# Altium PCB PMP30825_RevA.PcbDoc (part 3 of 3)
Units mil, origin at the board's own origin, x right, y up, seen from the top; angles counter-clockwise.
Board outline 3750 x 1750 mil, 2 copper layers (Top Layer, Bottom Layer), stack 62 mil thick; 85 components, 40 nets, 187 pads, 24 vias.
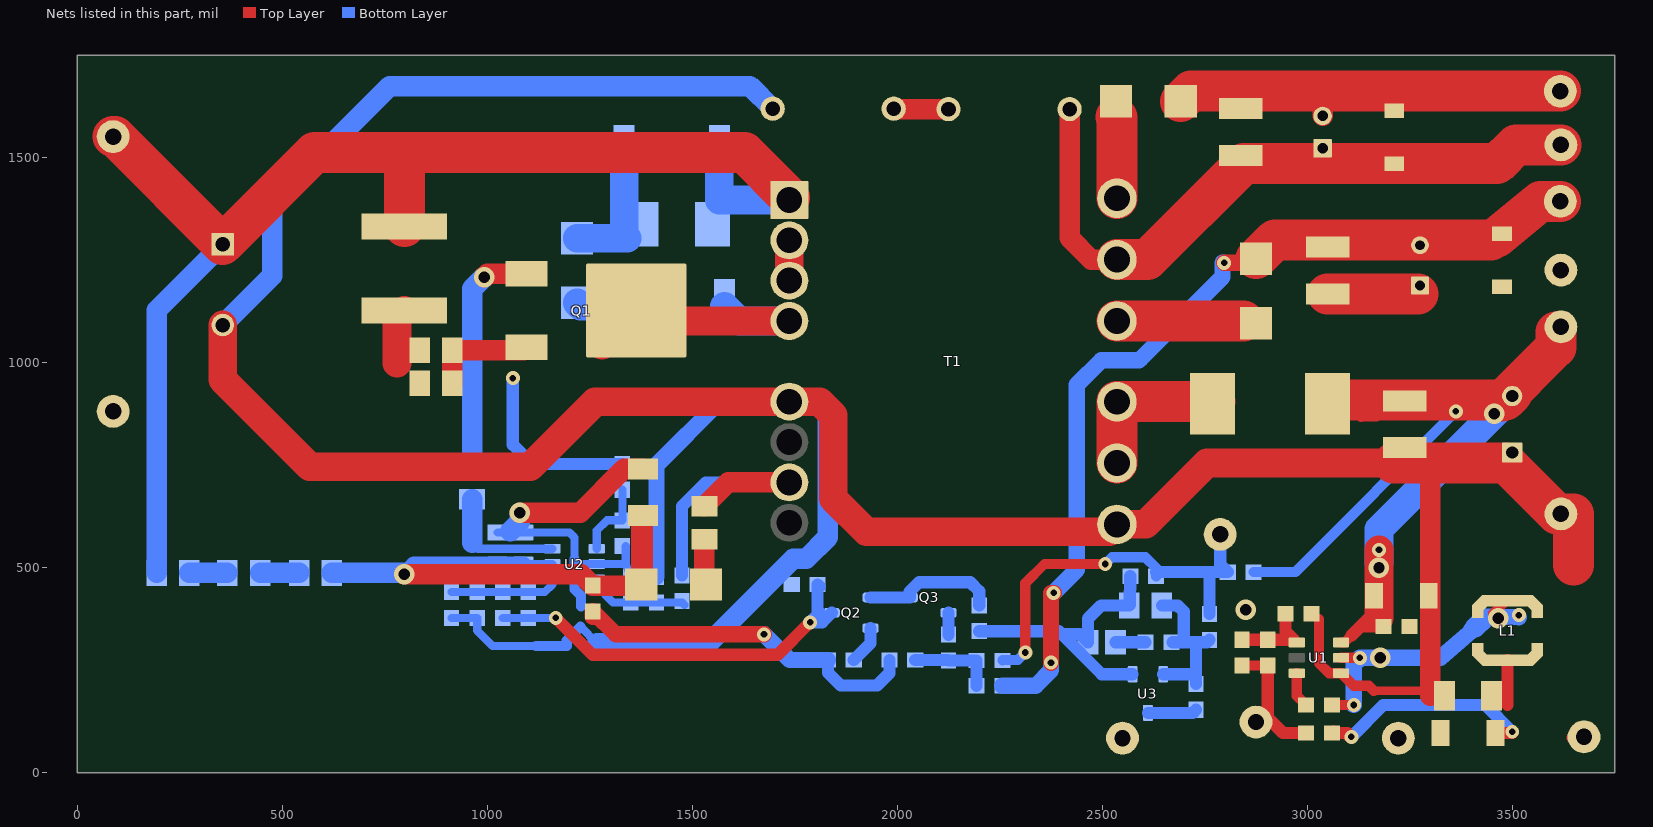
[diagram p2: the nets of this part, all layers, seen from the top]

## Part data (continued)
U2: library part CMP-0078369-2, "High-Efficiency Low-Cost Flyback Controller with Secondary-Side Regulation, DBV0006A (SOT-23-6)", Alternate Manufacturer="Texas Instruments", AEC Category=Q200, AEC Qualified=N, ComponentLink1Description="Datasheet Link", ComponentLink1URL=https://sps16.itg.ti.com/sites/KMS/crossdivteams/altium/docs/ComponentDatasheets/UCC28742_ds(preliminary)_20171023.pdf, ComponentLink2Description="Product Folder", ComponentLink2URL=TBD, ComponentLink3Description="Online Datasheet", ComponentLink3URL=http://www.ti.com/product/GPN/datasheet, CompType=IC, Manufacturer="Texas Instruments", MountType=SMT, PackageDescription=SOT-23-6, PackageReference=DBV0006A, PartNumber=UCC28742DBVR, SizeArea_mm2=8.12, SizeAreaWB_mm2=14.82, SizeX_mm=2.8, SizeY_mm=2.9, SizeZ_mm=1.45
U3: library part CMP-0084731-1, "High Bandwidth Low-Iq Programmable Shunt Regulator, DBZ0003A (SOT-23-3)", Alternate Manufacturer="Texas Instruments", AEC Category=Q200, AEC Qualified=N, ComponentLink1Description="Datasheet Link", ComponentLink1URL=http://www.ti.com/lit/ds/symlink/atl431li.pdf, ComponentLink2Description="Product Folder", ComponentLink2URL=http://www.ti.com/product/atl431li, ComponentLink3Description="Online Datasheet", ComponentLink3URL=http://www.ti.com/product/atl431li/datasheet, CompType=IC, Manufacturer="Texas Instruments", MountType=SMT, PackageDescription=SOT-23-3, PackageReference=DBZ0003A, PartNumber=ATL431LIBQDBZR, SizeArea_mm2=7.5, SizeAreaWB_mm2=14, SizeX_mm=2.5, SizeY_mm=3, SizeZ_mm=1.12

## Via types
v1: diameter 34, hole 16, Top Layer to Bottom Layer, 16 vias
v2: diameter 50, hole 28, Top Layer to Bottom Layer, 8 vias

## Nets (pads, with @x,y where several pads share a name; then routed paths per layer and width w, separated by ;. In a path a pad name is that pad's centre, name@x,y a point inside that pad or via, vN(x,y) a via of type N, cw(c..) or ccw(c..) an arc to the next point about the centre after c; other vN are vias at no path point)
12Vout: C7.1 C8.2 C13.1 C14.1 D7.1 R9.2 TP7.1 U1.3 | length 2301.4
  Top Layer w25: U1.3@3082.68,317.69 3090.94,317.69 3108.36,335.1 ; D7.1@3091.14,908.6 3131.25,868.49 3131.52,868.77 3168.75,868.77
  Top Layer w30: 3108.36,335.1 3129.92,356.67 ; C13.1@3162.7,431.9 3162.7,389.44 3129.92,356.67 ; C14.1@3186.02,356.67 3129.92,356.67
  Top Layer w50: C7.1@3219.1,919.13 C7.1@3229.63,908.6
  Top Layer w70: 3175,377.64 v2(3175,500) v1(3175,543.75)
  Top Layer w100: D7.1@3091.14,908.6 3229.63,908.6 3483.6,908.6 C8.2@3500,925 ; 3475,906.25 3593.75,1025 ; 3606.25,1037.68 TP7.1@3606.25,1075
  Bottom Layer w25: R9.2@2869,489.43 2970.68,489.43 v1(3362.5,881.25)
  Bottom Layer w70: v2@3175,512.5 v1(3175,543.75) 3175,593.9 v2(3456.25,875.15) C8.2@3500,918.9
15Vout: C5.2 C6.1 D4.1 D6.1 R7.2 TP4.1 | length 2224
  Top Layer w40: v1(2375,268.75) 2375,438.5 v1(2381.25,438.5) ; v1(2797.34,1243.75) 2865.01,1243.75 D4.1@2875,1253.74
  Top Layer w100: D4.1@2875,1253.74 2921.26,1300 3448.7,1300 ; D6.1@3462.35,1306.25 3568.75,1393.75 TP4.1@3617.46,1393.75
  Bottom Layer w25: 2589.73,1005.66 2593.75,1009.69
  Bottom Layer w40: R7.2@2256.5,212.5 2337.5,212.5 2375,250 v1(2375,268.75) ; v1(2381.25,438.5) 2437.5,494.75 2437.5,945.88 2497.28,1005.66 2589.73,1005.66 ; 2593.75,1009.69 2793.33,1209.27 2793.33,1243.75 v1(2797.34,1243.75)
GND: C3.2 C4.2 C5.1 C6.2 C7.2 C8.1 C9.2 C11.2 C13.2 C14.2 C16.2 C17.2 C18.2 C19.2 C20.2 C23.2 C25.2 D6.2 R20.1 R21.1 R25.1 R26.1 R28.1 R29.2 R30.1 T1.5 T1.9 TP5.1 TP6.1 TP8.1 TP12.1 TP13.1 U1.1 U2.5 U3.3 | length 10444
  Top Layer w20: 3162.5,200 3281.25,200
  Top Layer w25: R20.1@3028.54,374.28 3028.54,267.63 3053.29,242.88 U1.1@3082.68,242.88 3113.06,212.5 3150,212.5 3162.5,200
  Top Layer w50: v2(1079.63,634.13) 1226.54,634.13 1333.62,741.22 C11.2@1379.63,741.22 ; C9.2@1696.11,1619.59 C9.2@1696.11,1622.64 ; 3300,187.92 3300,755.39
  Top Layer w70: C4.2@354.82,1092.01 354.82,958.94 567.13,746.63 1104.63,746.63 1262.99,905 T1.5@1736.71,905 1810.67,905 1843.75,871.92 1843.75,668.75 1925,587.5 2517.64,587.5 T1.9@2535.93,605.79 2605.79,605.79 2755.39,755.39 3210.41,755.39 ; 779.63,999.13 779.63,1109.33 C3.2@797.74,1127.44
  Top Layer w100: C6.2@3050,1167.91 C5.1@3269.59,1167.91 ; 3210.41,755.39 3300,755.39 3485,755.39 3609.14,631.25 TP8.1@3618.75,631.25 3650,631.25 3650,506.25
  Bottom Layer w20: C25.2@912.89,377.64 R30.1@975.39,377.64 975.39,346.63 1012.89,309.13 1118.75,309.13 ; C17.2@1025.39,586 C18.2@1087.89,586 1200.39,586 1212.89,573.5 1212.89,521.63 1225.39,509.13 U2.5@1267.03,509.13 1337.89,509.13 ; 1227.49,356.25 1267.99,315.75 ; C23.2@1337.89,552.64 1337.89,509.13 ; C20.2@1412.89,478.13 R21.1@1350.39,478.13 1337.89,509.13
  Bottom Layer w25: 1118.75,309.13 1193.75,309.13 1193.75,322.51 1227.49,356.25 ; 1212.89,521.63 1212.89,447.71 1228.72,431.89 1228.72,406.25
  Bottom Layer w30: U3.3@2611.42,145.91 2721.02,145.91 R28.1@2728.64,153.53
  Bottom Layer w40: C20.2@1412.89,478.13 1412.89,750.77 1567.13,905 T1.5@1736.71,905
  Bottom Layer w50: C4.2@354.82,1092.01 475,1212.18 475,1387.5 762.5,1675 1640.7,1675 C9.2@1696.11,1619.59 ; 1056.64,589.41 1079.63,612.39 v2(1079.63,634.13) ; 1267.99,315.75 1540,315.75 1746.27,522.03 1778.19,522.03 1831,574.84 1831,884.66 1810.67,905 T1.5@1736.71,905
  other v2: 2850,397.29
IGND: C1.1 C2.2 C10.1 D2.2 T1.13 TP3.1 | length 1650.5
  Top Layer w50: C10.1@2420.28,1618.75 2420.28,1304.72 2473.54,1251.46 T1.13@2535.93,1251.46
  Top Layer w100: T1.13@2535.93,1251.46 2610.22,1251.46 2844.29,1485.53 D2.2@3212.5,1485.53 3463.4,1485.53 3509.12,1531.25 TP3.1@3618.75,1531.25
NetC1_2: C1.2 C2.1 D1.1 D2.1 TP1.1 | length 1002.4
  Top Layer w50: 3025,1662.5 3037.5,1650 C1.2@3037.5,1601.87
  Top Layer w100: D1.1@2691.24,1637.5 2716.24,1662.5 3025,1662.5 TP1.1@3617.46,1662.5
NetC3_1: C3.1 C4.1 D3.2 R1.2 R2.2 T1.1 TP2.1 | length 3231.4
  Top Layer w100: TP2.1@87.5,1551.66 92.02,1551.66 C4.1@354.82,1288.86 578.47,1512.5 800,1512.5 ; C3.1@797.74,1332.16 797.74,1510.24 800,1512.5 ; T1.1@1736.71,1402.83 1627.05,1512.5 800,1512.5
  Bottom Layer w50: R2.2@193.75,487.5 193.75,1127.78 C4.1@354.82,1288.86
  Bottom Layer w70: R1.2@1566.14,1512.5 1566.14,1397.12 T1.1@1736.71,1397.12
NetC9_1: C9.1 C10.2 | length 134
  Top Layer w50: C9.1@1991.39,1619.59 1992.22,1618.75 C10.2@2125,1618.75
NetC11_1: C11.1 C17.1 C18.1 D8.1 R4.1 R10.2 U2.2 | length 1440.6
  Top Layer w50: v2(797.74,484.13) 1229.63,484.13 R10.2@1257.26,456.5 1348.25,456.5 D8.1@1375.89,484.13 ; D8.1@1375.89,484.13 1379.63,484.13 C11.1@1379.63,627.05 1375.89,623.31 D8.1@1375.89,484.13
  Bottom Layer w20: C18.1@1087.89,509.13 U2.2@1158.76,509.13
  Bottom Layer w40: v2(797.74,484.13) 820.87,507.26 C17.1@1025.39,507.26 C18.1@1087.89,507.26
  Bottom Layer w50: R4.1@621.25,487.5 794.37,487.5 v2(797.74,484.13)
NetC12_1: C12.1 L1.1 U1.2 | length 688.2
  Top Layer w25: C12.1@3060.04,165.29 v1(3113.54,165.29) ; U1.2@3082.68,280.29 v1(3128.54,280.29) ; v2@3453.54,388.1 3484.73,419.29 L1.1@3488.54,419.29
  Bottom Layer w40: v1(3113.54,165.29) 3113.54,263.54 3128.54,278.54 v1(3128.54,280.29) v2(3178.54,280.29) 3313.05,280.29 ; 3325,280.29 3400,345.31 cw(c3409.69,345.31) 3409.69,355 ; 3429.73,375.04 3429.73,381.25 3429.91,381.25 3466.14,380.23 v1@3515.89,378.83
  Bottom Layer w50: 3409.69,355 3429.73,375.04
  other v1: 3516.04,384.42
  other v2: 3466.04,376.92
NetC12_2: C12.2 U1.6 | length 87
  Top Layer w25: U1.6@2974.41,242.88 2974.41,187.92 C12.2@2997.05,165.29
NetC15_1: C15.1 R8.1 R14.2 TP10.1 | length 335.9
  Top Layer w25: C15.1@2841.04,261.29 R14.2@2903.54,261.29
  Top Layer w30: TP10.1@2866.04,134.42 TP10.1@2903.54,134.42 ; R14.2@2903.54,261.29 TP10.1@2903.54,134.42 ; R8.1@2997.05,96.92 2941.04,96.92 TP10.1@2903.54,134.42
NetC15_2: C15.2 R14.1 R20.2 U1.4 | length 198.7
  Top Layer w30: C15.2@2841.04,324.28 2967.44,324.28 2947.05,344.67 R20.2@2947.05,388.1
NetC16_1: C16.1 C19.1 L1.2 R8.2 TP9.1 | length 668.2
  Top Layer w30: R8.2@3063.98,100.86 R8.2@3060.04,96.92 3098.36,96.92 ccw(c3107.78,96.92) v1@3101.39,90 ; C19.1@3459.16,96.92 3500,96.92 v1(3500,100) ; 3488.54,165.29 L1.2@3488.54,274.29 ; TP9.1@3647.69,85.19 TP9.1@3656.25,93.75
  Bottom Layer w30: v1(3107.78,87.5) 3185.56,165.29 3434.71,165.29 v1(3500,100)
NetC20_1: C20.1 R13.1 R21.2 U2.6 | length 250.1
  Bottom Layer w20: U2.6@1267.03,471.73 1267.03,455 1306.89,415.14 R21.2@1350.39,415.14 C20.1@1412.89,415.14 1475.39,415.14 R13.1@1481.4,409.13
NetC21_1: C21.1 R18.1 R23.2 R28.2 U3.2 | length 411.3
  Bottom Layer w30: C21.1@2645.71,408.13 2683.94,408.13 2698.92,393.15 2698.92,318.15 ; U3.2@2648.82,240.39 2725.75,240.39 2728.64,237.5 ; R23.2@2671.65,318.15 2698.92,318.15 ; R28.2@2728.64,216.52 2728.64,237.5 ; R18.1@2761.42,324.15 2755.41,318.15 2723.92,318.15 ; 2698.92,318.15 2723.92,318.15 ; 2723.92,318.15 2728.64,313.42 2728.64,237.5
NetC21_2: C21.2 C22.1 R17.2 R24.1 U3.1 | length 733.3
  Bottom Layer w30: R24.1@2200,345.31 2394,345.31 2401.09,338.22 ; R17.2@2568.5,479 2567.42,409.84 C21.2@2565.71,408.13 2497.28,408.13 2465.45,376.3 C22.1@2465.45,318.15 2445.39,338.22 2401.09,338.22 ; U3.1@2574.02,240.39 2498.92,240.39 2401.09,338.22
NetC22_2: C22.2 R23.1 | length 73.3
  Bottom Layer w30: C22.2@2532.38,318.15 R23.1@2605.71,318.15
NetC23_1: C23.1 R22.2 U2.4 | length 191.5
  Bottom Layer w20: U2.4@1267.03,546.53 1267.03,590.53 1292.13,615.63 C23.1@1329.63,615.63 R22.2@1329.63,690.14
NetC24_1: C24.1 C25.1 R27.2 R30.2 U2.1 | length 266.1
  Bottom Layer w20: C25.1@912.89,440.63 C24.1@1037.89,440.63 1140.26,440.63 1158.76,459.13 U2.1@1158.76,471.73
NetC24_2: C24.2 Q2.3 R27.1 R29.1 | length 993.1
  Top Layer w30: v1(1167.13,377.64) 1257.26,287.5 1707.99,287.5 v1(1787.5,367.01)
  Bottom Layer w20: C24.2@1037.89,377.64 R27.1@1100.39,377.64 v1(1167.13,377.64)
  Bottom Layer w30: R29.1@1810.67,454.11 R29.1@1805.65,459.13 1805.65,395.19 1810.67,390.17 v1(1787.5,367.01) 1817.09,367.01 Q2.3@1840.26,390.17
NetD1_2: D1.2 T1.14 | length 199.8
  Top Layer w100: D1.2@2533.76,1600 2535.93,1597.83 T1.14@2535.93,1401.06
NetD3_1: D3.1 D5.1 R1.1 | length 334.6
  Bottom Layer w70: D5.1@1219.14,1303.74 1341.73,1303.74 1333.86,1311.61 R1.1@1333.86,1512.5
NetD4_2: D4.2 T1.12 | length 308.4
  Top Layer w100: T1.12@2535.93,1101.85 D4.2@2844.29,1101.85
NetD5_2: D5.2 R5.2 | length 130.8
  Bottom Layer w70: D5.2@1219.14,1146.26 1227.9,1137.5 R5.2@1346.36,1137.5
NetD7_2: D7.2 T1.10 T1.11 | length 408.7
  Top Layer w50: D7.2@2775,905 D7.2@2789.13,919.13
  Top Layer w100: T1.10@2535.93,755.39 T1.11@2535.93,905 D7.2@2775,905
NetD8_2: D8.2 R6.1 | length 112.1
  Top Layer w50: R6.1@1529.63,569.72 1529.63,462.87 D8.2@1533.37,459.13
NetQ1_1: Q1.1 R19.2 | length 581.6
  Top Layer w50: v2(992.13,1209.13) 1000.2,1217.2 Q1.1@1095.77,1217.2
  Bottom Layer w50: R19.2@962.89,746.63 962.89,1179.9 v2(992.13,1209.13)
NetQ1_2: Q1.2 R5.1 T1.4 | length 654.3
  Top Layer w70: Q1.2@1279.63,1042.99 1338.48,1101.85 T1.4@1736.71,1101.85
  Bottom Layer w70: R5.1@1578.64,1137.5 1614.29,1101.85 T1.4@1736.71,1101.85
NetQ1_3: Q1.3 R22.1 R25.2 R26.2 | length 713.3
  Top Layer w50: R25.2@915,950 R26.2@915,1030.45 1088.54,1030.45 Q1.3@1095.77,1037.68
  Bottom Layer w30: v1(1062.5,962.5) 1062.5,800 1109.37,753.13 R22.1@1329.63,753.13
NetQ2_1: Q2.1 Q3.1 Q3.3 R24.2 | length 332.7
  Bottom Layer w30: Q2.1@1934.74,427.58 Q3.3@2030.51,427.58 2030.51,441.83 2053.66,464.98 Q3.1@2125,464.98 2177.69,464.98 2200,442.67 R24.2@2200,408.3
NetQ2_2: Q2.2 R15.1 | length 94.7
  Bottom Layer w30: R15.1@1894,275 1934.74,315.75 Q2.2@1934.74,352.77
NetQ3_2: Q3.2 R16.1 | length 53.3
  Bottom Layer w30: R16.1@2125,336.9 Q3.2@2125,390.17
NetR2_1: R2.1 R3.2 | length 92.5
  Bottom Layer w50: R2.1@273.75,487.5 R3.2@366.25,487.5
NetR3_1: R3.1 R4.2 | length 95
  Bottom Layer w50: R3.1@446.25,487.5 R4.2@541.25,487.5
NetR6_2: R6.2 R13.2 T1.7 | length 685.6
  Top Layer w50: R6.2@1529.63,649.72 1588.05,708.15 T1.7@1736.71,708.15
  Bottom Layer w30: R13.2@1475,481.5 1475,650 1533.15,708.15 T1.7@1736.71,708.15
NetR7_1: R7.1 R11.1 R12.2 R16.2 | length 211.4
  Bottom Layer w30: R11.1@2044,275 2123.91,275 R16.2@2125,273.91 R12.2@2193.5,273.91 R7.1@2193.5,212.5
NetR9_1: R9.1 R12.1 R17.1 R18.2 TP11.1 | length 986.1
  Top Layer w25: v1(2312.5,293.34) 2312.5,462.5 2359.13,509.13 v1(2507.28,509.13)
  Bottom Layer w25: R12.1@2256.5,273.91 2257.59,275 2294.16,275 v1(2312.5,293.34) ; v1(2507.28,509.13) 2523.69,525.54 2605.23,525.54 2631.5,499.28 2631.5,489.43 R17.1@2631.5,479
  Bottom Layer w30: R17.1@2631.5,489.43 2760.57,489.43 ; R18.2@2761.42,387.15 2761.42,488.58 2760.57,489.43 ; TP11.1@2787.5,581.25 2787.5,507.94 R9.1@2806,489.43 2760.57,489.43
NetR10_1: R10.1 R11.2 R15.2 | length 874.4
  Top Layer w40: R10.1@1257.26,380.24 R10.1@1257.26,393.5 1313.27,337.5 v1(1675,337.5)
  Bottom Layer w30: R15.2@1831,275 1831,244 1862.01,212.99 1950.98,212.99 1981,243.01 R11.2@1981,275
  Bottom Layer w40: v1(1675,337.5) 1737.5,275 R15.2@1831,275
NetR19_1: R19.1 U2.3 | length 307.4
  Bottom Layer w20: 963.03,560.94 977.44,546.53 U2.3@1158.76,546.53
  Bottom Layer w50: R19.1@962.89,666.63 962.89,561.08 963.03,560.94
NetT1_2: T1.2 T1.3 | length 98.4
  Top Layer w70: T1.3@1736.71,1200.27 T1.2@1736.71,1298.7
pads on no net: T1.6 T1.8 U1.5

## Polygon pours and split planes (outlines as drawn)
NetC3_1 on Top Layer "TOP_LAYER_NETC3_1_P036" (solid, remove dead copper, pour order 36): 418.75,1239.21 104.54,1239.21 cw(c104.54,1306.25) 37.5,1306.25 37.5,1575 cw(c81.25,1575) 81.25,1618.75 343.75,1618.75 cw(c343.75,1581.25) 381.25,1581.25 ccw(c400,1581.25) 400,1562.5 595.03,1562.5
GND on Top Layer "TOP_LAYER_GND_P032" (solid, remove dead copper, pour order 32): 2493.75,1275 cw(c2525,1275) 2525,1306.25 2686.59,1306.25 ccw(c2686.59,1332.16) 2712.5,1332.16 cw(c2730.34,1332.16) 2730.34,1350 3689.47,1350 cw(c3689.47,1314.47) 3725,1314.47 3725,44.34 cw(c3706.15,44.34) 3706.15,25.49 2552.68,25.49 cw(c2552.68,84.42) 2493.75,84.42
NetC12_1 on Top Layer "TOP_LAYER_NETC12_1_P026" (solid, remove dead copper, pour order 26): 3112.5,293.34 cw(c3125.41,293.34) 3125.41,306.25 3182.79,306.25 cw(c3182.79,282.79) 3206.25,282.79 3206.25,280.07 cw(c3181.25,280.07) 3181.25,255.07 3151.18,255.07 cw(c3151.18,262.5) 3143.75,262.5 ccw(c3139.02,262.5) 3139.02,267.23 3119.97,267.23 cw(c3119.97,275) 3112.2,275
GND on Top Layer "TOP_LAYER_GND_P024" (solid, remove dead copper, pour order 24): 3212.5,344.56 cw(c3229.63,344.56) 3229.63,361.68 3338.32,361.68 cw(c3338.32,337.5) 3362.5,337.5 3362.5,52.84 cw(c3335.15,52.84) 3335.15,25.49 3249.51,25.49 cw(c3249.51,62.5) 3212.5,62.5
NetC16_1 on Top Layer "TOP_LAYER_NETC16_1_P022" (solid, remove dead copper, pour order 22): 3386.04,300 3386.04,312.63 cw(c3397.69,312.63) 3397.69,324.28 3713.22,324.28 cw(c3713.22,312.5) 3725,312.5 3725,50 cw(c3700,50) 3700,25 3411.27,25 cw(c3411.27,50) 3386.27,50
NetC12_1 on Top Layer "TOP_LAYER_NETC12_1_P018" (solid, remove dead copper, pour order 18): 3568.29,359.42 3400.65,359.42 cw(c3400.65,374.28) 3385.79,374.28 3385.79,421.92 cw(c3398.21,419.48) 3400.65,431.9 3579.65,431.9 cw(c3577.73,423.85) 3585.79,421.92 3585.79,376.92 cw(c3568.29,376.92)
NetQ1_3 on Top Layer "TOP_LAYER_NETQ1_3_P000" (solid, remove dead copper, pour order 0): 894.42,1063.3 cw(c902.34,1063.3) 902.34,1071.22 1143.33,1071.22 cw(c1143.33,1052.05) 1162.5,1052.05 1162.5,935.45 cw(c1145.95,935.45) 1145.95,918.9 910.71,918.9 cw(c910.71,937.5) 892.1,937.5
NetC3_1 on Top Layer "TOP_LAYER_NETC3_1_P008" (solid, remove dead copper, pour order 8): 347.92,1237.5 873.3,1237.5 ccw(c873.3,1282.09) 917.89,1282.09 917.89,1288.26 cw(c992.13,1288.26) 992.13,1362.5 1750,1362.5 ccw(c1750,1387.5) 1775,1387.5 1775,1512.5 ccw(c1725,1512.5) 1725,1562.5 600,1562.5 ccw(c600,1537.5) 575,1537.5
GND on Top Layer "TOP_LAYER_GND_P006" (solid, remove dead copper, pour order 6): 875,975 ccw(c875,1025) 925,1025 925,1100 ccw(c862.5,1100) 862.5,1162.5 81.25,1162.5 ccw(c81.25,1121.88) 40.62,1121.88 40.62,300.79 ccw(c81.25,300.78) 81.25,260.16 1718.75,260.16 ccw(c1726.56,308.6) 1775,300.78 1775,917.13 ccw(c1754.63,917.13) 1754.63,937.5 1009.36,937.5 cw(c1009.35,1021.85) 925,1021.86
NetQ1_2 on Top Layer "TOP_LAYER_NETQ1_2_P002" (solid, remove dead copper, pour order 2): 1662.5,1137.5 1626.77,1137.5 cw(c1626.77,1214.27) 1550,1214.27 ccw(c1501.77,1214.27) 1501.77,1262.5 1269.14,1262.5 ccw(c1269.14,1212.5) 1219.14,1212.5 1219.14,1030.86 ccw(c1250,1030.86) 1250,1000 1507.01,1000 ccw(c1507.01,1042.99) 1550,1042.99 cw(c1582.01,1042.99) 1582.01,1075 1650,1075
IGND on Bottom Layer "BOTTOM_LAYER_IGND_P034" (solid, remove dead copper, pour order 34): 2681.25,1212.5 ccw(c2681.25,1237.5) 2706.25,1237.5 2706.25,1338.38 cw(c2755.37,1338.38) 2755.37,1387.5 3675,1387.5 ccw(c3675,1437.5) 3725,1437.5 3725,1693.75 ccw(c3687.5,1693.75) 3687.5,1731.25 2400,1731.25 ccw(c2400,1718.75) 2387.5,1718.75 2387.5,1543.75 ccw(c2412.5,1543.75) 2412.5,1518.75 2481.25,1518.75 cw(c2481.25,1487.5) 2512.5,1487.5 2512.5,1232.38 ccw(c2532.38,1232.38) 2532.38,1212.5
GND on Bottom Layer "BOTTOM_LAYER_GND_P030" (solid, remove dead copper, pour order 30): 2749.85,1150 ccw(c2749.85,1206.25) 2806.1,1206.25 2806.1,1293.6 cw(c2850,1293.6) 2850,1337.5 3712.5,1337.5 cw(c3712.5,1312.5) 3737.5,1312.5 3737.5,62.5 cw(c3700,62.5) 3700,25 2534.78,25 cw(c2534.78,62.5) 2497.28,62.5 2497.28,1114.9 cw(c2532.38,1114.9) 2532.38,1150
no net on Bottom Layer "BOTTOM_LAYER_NONET_P028" (solid, remove dead copper, pour order 28): 2493.75,1162.5
NetC12_1 on Bottom Layer "BOTTOM_LAYER_NETC12_1_P020" (solid, remove dead copper, pour order 20): 3412.5,336.9 3529.09,336.9 ccw(c3529.09,345.31) 3537.5,345.31 3537.5,368.15 ccw(c3525,368.15) 3525,380.65 3405.65,380.65 ccw(c3405.65,375) 3400,375
GND on Bottom Layer "BOTTOM_LAYER_GND_P014" (solid, remove dead copper, pour order 14): 706.1,950 ccw(c706.1,918.9) 675,918.9 675,50 ccw(c712.5,50) 712.5,12.5 1750,12.5 ccw(c1750,50) 1787.5,50 1787.5,913.18 ccw(c1750.68,913.18) 1750.68,950
NetC3_1 on Bottom Layer "BOTTOM_LAYER_NETC3_1_P012" (solid, remove dead copper, pour order 12): 1511.65,1252.84 cw(c1511.65,1276.99) 1487.5,1276.99 1487.5,1575 cw(c1512.5,1575) 1512.5,1600 1775,1600 cw(c1775,1575) 1800,1575 1800,1375 cw(c1775,1375) 1775,1350 1662.5,1350 ccw(c1662.5,1312.5) 1625,1312.5 1625,1265.34 cw(c1612.5,1265.34) 1612.5,1252.84
NetD3_1 on Bottom Layer "BOTTOM_LAYER_NETD3_1_P010" (solid, remove dead copper, pour order 10): 1425,1251.46 1186.29,1251.46 cw(c1186.29,1287.5) 1150.25,1287.5 1150.25,1577.12 cw(c1175,1577.12) 1175,1601.87 1401.57,1601.87 cw(c1401.57,1578.44) 1425,1578.44 1425,1273.92 cw(c1400,1273.92) 1400,1248.92

## Keep-outs
Keep-Out Layer:
  text ".Layer_Name" at 577,-858.49 h60

## Other copper
Top Layer:
  text ".Layer_Name" at 577,-858.49 h60
Bottom Layer:
  text ".Layer_Name" at 577,-858.49 h60

## Silkscreen, mask and mechanical layers (free items; w line width, h text height)
Top Overlay:
  text "PMP30825_RevA" at 68.75,125 h120
  text ".Layer_Name" at 577,-858.49 h30
Bottom Overlay:
  text ".Layer_Name" at 577,-858.49 h30
Top Paste:
  text ".Layer_Name" at 577,-858.49 h60
Bottom Paste:
  text ".Layer_Name" at 577,-858.49 h60
Top Solder:
  text ".Layer_Name" at 577,-858.49 h60
  text ".Layer_Name" at 577,-858.49 h60
Bottom Solder:
  text ".Layer_Name" at 577,-858.49 h60
Drill Guide:
  text ".Layer_Name" at 577,-858.49 h60
M1 Board Outline:
  the board outline again, w10
  text ".Layer_Name" at 577,-858.49 h60
M2 Board Dimensions:
  rectangle: 0,-275 125,-150
  rectangle: 125,-400 500,-275
  lines w7: 0,-275 1000,-275 ; 125,-400 125,-150 ; 250,-400 250,-150 ; 500,-400 500,-150 ; 750,-400 750,-150 ; 0,-400 1000,-400 1000,-150 0,-150 0,-400
  text ".Layer_Name" at 577,-858.49 h60
M3 3D STEP Top:
  text ".Layer_Name" at 577,-858.49 h60
M4 3D STEP Bottom:
  text ".Layer_Name" at 577,-858.49 h60
M5 Assembly Top:
  lines w10: -292,-930.17 6308,-930.17 ; -292,-726.83 6310,-726.83 ; -292,-523.5 -292,-1133.5 3713,-1133.5 6310,-1133.5 6310,-523.5 -291.5,-523.5 -291.5,-1133.5 1284,-1133.5 ; 2173,-1133.5 2173,-523.5 ; 3440,-726.83 3440,-523.5 ; 4280,-726.83 4280,-523.5 ; 4902,-1140 4902,-937.17
  text "COMPONENTS MARKED 'DNP' SHOULD NOT BE POPULATED." at 1153.5,-318.5 h60
  text "ASSEMBLY VARIANT:" at 1153,-434 h60
  text ".VariantName" at 2189,-434 h60
  text "PCB VIEWED FROM TOP SIDE" at -228.5,-655.67 h60
  text "BOARD #:" at 2248,-655.67 h60
  text ".PRJ_Number" at 2793.5,-655.67 h60
  text "REV:" at 3638,-655.67 h60
  text ".PCB_Rev" at 3929.5,-655.67 h60
  text "SVN REV:" at 4476,-655.67 h60
  text ".VersionControl_RevNumber" at 4982,-655.67 h60
  text "TID #:" at 2248,-859 h60
  text ".TID" at 2793.5,-859 h60
  text "PLOT NAME =" at -228.5,-1064.34 h60
  text ".plot_File_Name" at 577,-1064.34 h60
  text "GENERATED    :" at 2250,-1064.34 h60
  text ".Print_Date" at 3119.5,-1064.34 h60
  text ".Print_Time" at 3848.5,-1064.34 h60
  text "TEXAS INSTRUMENTS" at 5113,-1064.34 h60
M6 Assembly Bottom:
  lines w10: -292.5,-727.33 6309.5,-727.33 ; -290.5,-930.67 6309.5,-930.67 ; 1115.5,-1140.5 1115.5,-937.67 ; 1737.5,-727.33 1737.5,-524 ; 2577.5,-727.33 2577.5,-524 ; 3844.5,-1134 3844.5,-524 ; 4733.5,-1134 6309,-1134 6309,-524 -292.5,-524 -292.5,-1134 2304.5,-1134 6309.5,-1134 6309.5,-524
  text "COMPONENTS MARKED 'DNP' SHOULD NOT BE POPULATED." at 6102,-318 h60
  text ".VariantName" at 5058,-434 h60
  text "ASSEMBLY VARIANT:" at 6097,-434 h60
  text ".VersionControl_RevNumber" at 1035.5,-656.17 h60
  text "SVN REV:" at 1541.5,-656.17 h60
  text ".PCB_Rev" at 2088,-656.17 h60
  text "REV:" at 2379.5,-656.17 h60
  text ".PRJ_Number" at 3224,-656.17 h60
  text "BOARD #:" at 3769.5,-656.17 h60
  text "PCB VIEWED FROM BOTTOM SIDE" at 6246,-656.17 h60
  text ".TID" at 3224,-859.5 h60
  text "TID #:" at 3769.5,-859.5 h60
  text "TEXAS INSTRUMENTS" at 904.5,-1064.84 h60
  text ".Print_Time" at 2169,-1064.84 h60
  text ".Print_Date" at 2898,-1064.84 h60
  text "GENERATED    :" at 3767.5,-1064.84 h60
  text ".plot_File_Name" at 5440.5,-1064.84 h60
  text "PLOT NAME =" at 6246,-1064.84 h60
M9 Title Sheet:
  drawing of 57 lines, arcs and shapes, not listed
  text "1" at 739.84,8036.5 h70
  text "2" at 3235.5,8036.5 h70
  text "3" at 5724.84,8036.5 h70
  text "4" at 8231.51,8036.5 h70
  text "5" at 10730.5,8036.5 h70
  text "6" at 13235.5,8036.5 h70
  text "A" at -416.5,6893.5 h70
  text "A" at 14383.5,6893.5 h70
  text "B" at -416.5,4513.5 h70
  text "B" at 14383.5,4513.5 h70
  text "C" at -416.5,2138.5 h70
  text "C" at 14383.5,2138.5 h70
  text "PROJECT TITLE:" at 11343.5,277.5 h45
  text ".PRJ_Title" at 11393.5,144.17 h70
  text "DESIGNED FOR:" at 11343.5,-23.5 h45
  text ".PRJ_Customer" at 11393.5,-163.5 h70
  text "D" at -416.5,-231.5 h70
  text "D" at 14383.5,-231.5 h70
  text "FILE NAME:" at 11343.5,-323.5 h45
  text ".PCB_File_Name_No_Path" at 11393.5,-443.5 h70
  text "Texas Instruments (TI) and/or its licensors do not warrant the accuracy or completeness of this specification" at 6374,-605.34 h45
  text "ENGINEER:" at 11343.5,-613.5 h45
  text "LAYOUT BY:" at 12848.5,-613.5 h45
  text "or any information contained therein. TI and/or its licensors do not warrant that this design will meet" at 6329.01,-718 h45
  text ".PRJ_Engineer" at 11393.5,-768.49 h70
  text ".PCB_Layout" at 12899,-768.49 h70
  text "the specifications, will be suitable for your application or fit for any particular purpose, or will operate in" at 6329.01,-830.67 h45
  text ".Layer_Name" at 577,-858.49 h60
  text "ALTIUM DESIGNER VERSION:" at 12848.5,-923.5 h45
  text "an implementation. TI and/or its licensors do not warrant that the design is production worthy. You should" at 6329.01,-943.33 h45
  text "completely validate and test your design implementation to confirm the system functionality for your application." at 6374,-1056 h45
  text ".print_Scale" at 11393.5,-1056.83 h70
  text ".Application_BuildNumber" at 12899,-1056.83 h70
  text "1" at 739.84,-1263.5 h70
  text "2" at 3235.5,-1263.5 h70
  text "3" at 5724.84,-1263.5 h70
  text "4" at 8231.51,-1263.5 h70
  text "5" at 10730.5,-1263.5 h70
  text "6" at 13235.5,-1263.5 h70
M10 Fab Notes:
  text ".Layer_Name" at 577,-858.49 h60
M11 Gerber Information:
  lines w10: -292,-930.17 6308,-930.17 ; -292,-726.83 6310,-726.83 ; -292,-523.5 -292,-1133.5 3713,-1133.5 6310,-1133.5 6310,-523.5 -291.5,-523.5 -291.5,-1133.5 1284,-1133.5 ; 2173,-1133.5 2173,-523.5 ; 3440,-726.83 3440,-523.5 ; 4280,-726.83 4280,-523.5 ; 4902,-1140 4902,-937.17
  text "ALL ARTWORK VIEWED FROM TOP SIDE" at -228.5,-655.67 h60
  text "BOARD #:" at 2248,-655.67 h60
  text ".PRJ_Number" at 2793.5,-655.67 h60
  text "REV:" at 3638,-655.67 h60
  text ".PCB_Rev" at 3929.5,-655.67 h60
  text "SVN REV:" at 4476,-655.67 h60
  text ".VersionControl_RevNumber" at 4982,-655.67 h60
  text "LAYER NAME =" at -228.5,-858.49 h60
  text "TID #:" at 2248,-859 h60
  text ".TID" at 2793.5,-859 h60
  text "PLOT NAME =" at -228.5,-1064.34 h60
  text ".plot_File_Name" at 577,-1064.34 h60
  text "GENERATED    :" at 2250,-1064.34 h60
  text ".Print_Date" at 3119.5,-1064.34 h60
  text ".Print_Time" at 3848.5,-1064.34 h60
  text "TEXAS INSTRUMENTS" at 5113,-1064.34 h60
M12 Stackup:
  text ".Layer_Name" at 577,-858.49 h60
M13 Component Bodies Top:
  text ".Layer_Name" at 577,-858.49 h60
M14 Component Bodies Bottom:
  text ".Layer_Name" at 577,-858.49 h60
M15 Courtyards Top:
  text ".Layer_Name" at 577,-858.49 h60
M16 Courtyards Bottom:
  text ".Layer_Name" at 577,-858.49 h60
Drill Drawing:
  text ".Layer_Name" at 577,-858.49 h60
M17 Embedded Cavity:
  text ".Layer_Name" at 577,-858.49 h60
M18 Embedded Assembly:
  text ".Layer_Name" at 577,-858.49 h60
M19 Embedded Keepout:
  text ".Layer_Name" at 577,-858.49 h60

## Dimensions
0,-400 to 1000,-400 on M2 Board Dimensions
0,0 to 0,1750 on M2 Board Dimensions
0,0 to 3750,0 on M2 Board Dimensions

## Text inside footprints (layer, text, board x,y; h text height)
C4: Top Overlay "+" at 335.14,1495.74 h30 r270; M5 Assembly Top "+" at 335.14,1495.74 h40 r270